# EAGLE board Teensy-Long (EAGLE 9.5.2)
REV: A
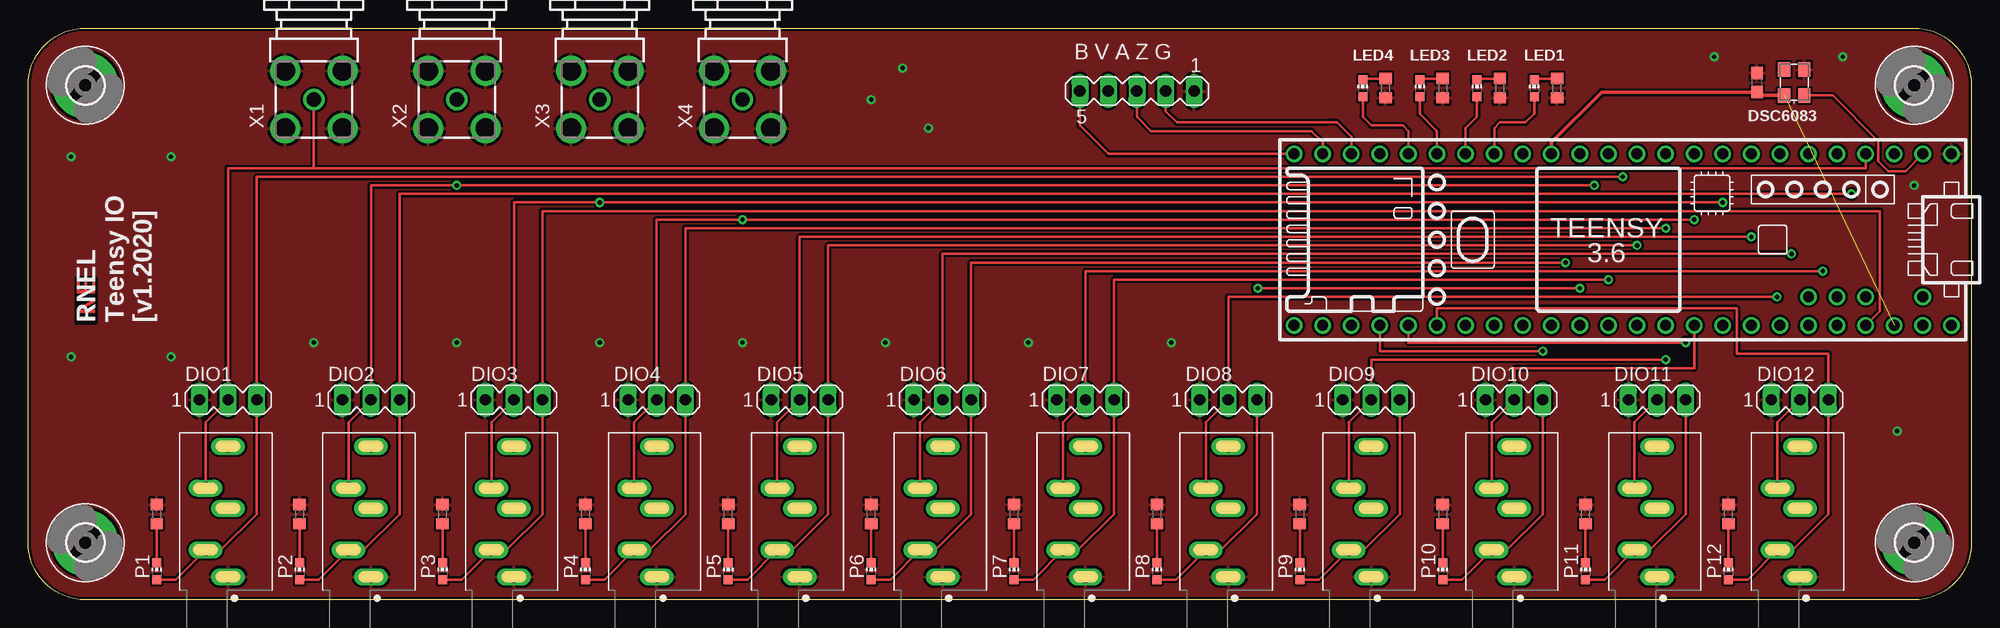
[diagram p0: board, top side]
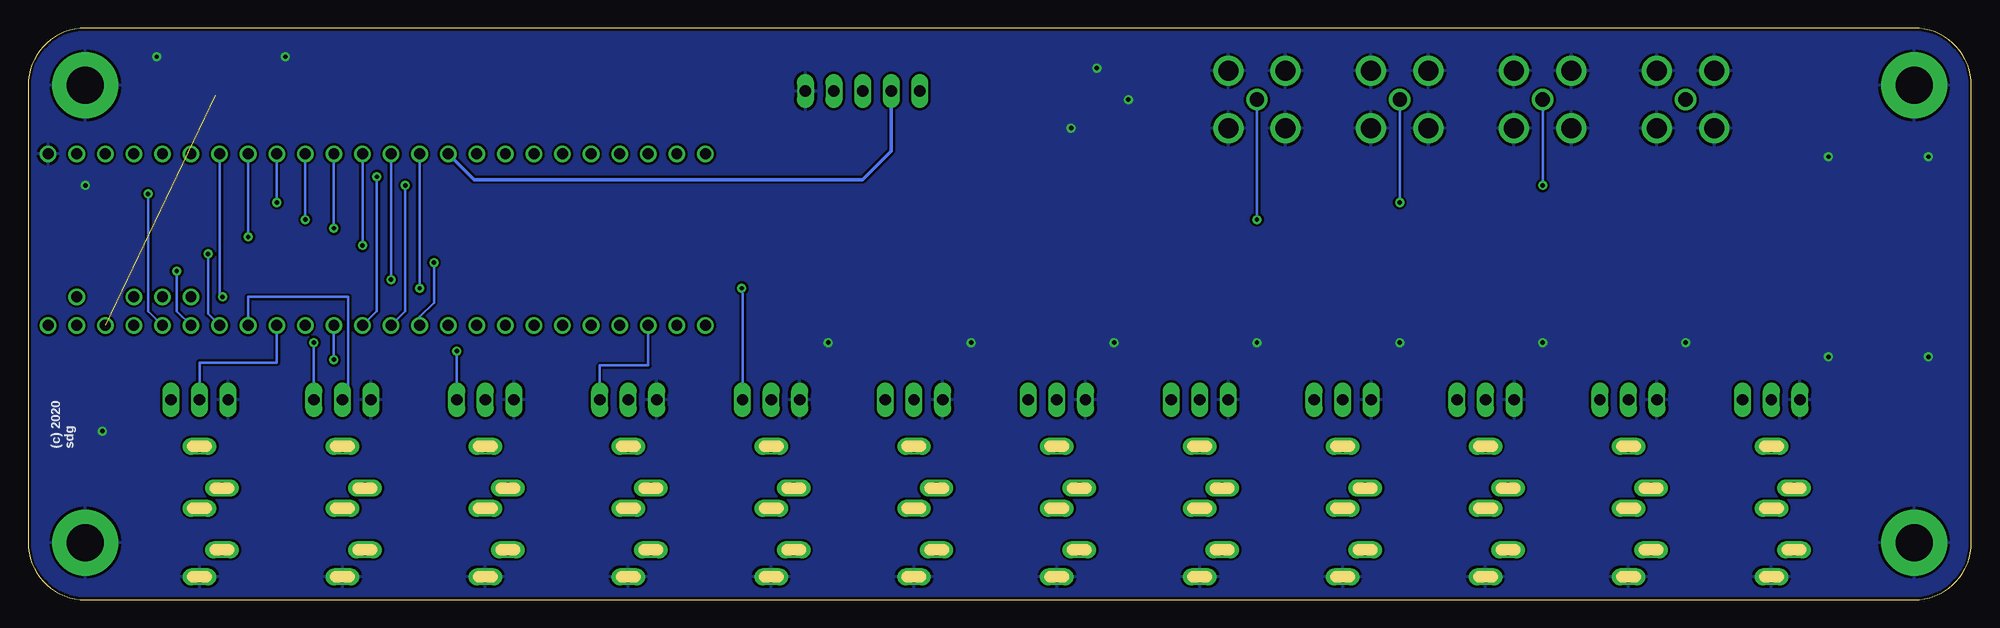
[diagram p1: board, bottom side, seen from below]

Size 172.72 x 50.8 mm. Coordinates in mm from the lower left corner, seen from the top.
Outline: 5.08,50.8 167.64,50.8 arc-90 172.72,45.72 172.72,5.08 arc-90 167.64,0 5.08,0 arc-90 0,5.08 0,45.72 arc-90 5.08,50.8
Copper layers (1*16): Top 0.035mm / dielectric 1.5mm / Bottom 0.035mm
Design rules "adafruit *": minimum track width 8mil, minimum drill 15.5mil, track to track 8mil, track to pad 8mil, pad to pad 8mil, via to via 8mil, smd to smd 8mil, copper to edge 10mil, drill to drill 8mil, minimum pad ring 10mil, minimum via ring 8mil, stop-mask expansion 2mil, vias tented up to drill 20mil, thermal gap 10mil
Net classes: 0 default: clearance 0.205 mm

## Footprints (pad centres in the part's own frame; a part is rotated, then mirrored left to right if it is on the bottom)
MA05-1 = drill 1.016 long: 1 -5.08,0; 2 -2.54,0; 3 0,0; 4 2.54,0; 5 5.08,0
C0603 = smd 1.1 x 1: 1 -0.85,0; 2 0.85,0
MA03-1 = drill 1.016 long: 1 -2.54,0; 2 0,0; 3 2.54,0
3.2X2.5_KXO-V96 = smd 1.3 x 1.1: 1 -1.15,-0.9; 2 1.15,-0.9; 3 1.15,0.9; 4 -1.15,0.9
3,3-PAD = drill 3.3 pad 5.842: B3,3 0,0
CUI_SJ1-3535 = drill 1 long: 1 0,0; 2 2.4,2; 3 7.9,2; 4 11.6,0; 5 6.1,0
CHIP-LED0603 = smd 0.8 x 0.8: A 0,-0.75; C 0,0.75
R0603 = smd 1 x 1.1: 1 -0.85,0; 2 0.85,0
TEENSY_3.5/3.6_BASIC = drill 0.965: 0/RX -25.4,-7.62; 1/TX -22.86,-7.62; 2 -20.32,-7.62; 3/CANTX -17.78,-7.62; 3V3 7.62,-7.62; 3V3_LO -22.86,7.62; 4/CANRX -15.24,-7.62; 5 -12.7,-7.62; 6 -10.16,-7.62; 7 -7.62,-7.62; 8 -5.08,-7.62; 9/CS -2.54,-7.62; 10/CS 0,-7.62; 11/MOSI 2.54,-7.62; 12/MISO 5.08,-7.62; 13/SCK 5.08,7.62; 14/A0 2.54,7.62; 15/A1 0,7.62; 16/A2 -2.54,7.62; 17/A3 -5.08,7.62; 18/A4/SDA -7.62,7.62; 19/A5/SCL -10.16,7.62; 20/A6 -12.7,7.62; 21/A7 -15.24,7.62; 21/DAC0 12.7,7.62; 22/A8 -17.78,7.62; 23/A9 -20.32,7.62; 24 10.16,-7.62; 25 12.7,-7.62; 26 15.24,-7.62; 27 17.78,-7.62; 28 20.32,-7.62; 29 22.86,-7.62; 30 25.4,-7.62; 31/A12 27.94,-7.62; 32/A13 30.48,-7.62; 33/A14 30.48,7.62; 34/A15 27.94,7.62; 35/A16 25.4,7.62; 36/A17 22.86,7.62; 37/A18 20.32,7.62; 38/A19 17.78,7.62; 39/A20 15.24,7.62; A10 -17.78,5.08; A11 -15.24,5.08; A22/DAC1 10.16,7.62; AGND -25.4,7.62; AREF -20.32,5.08; GND -27.94,-7.62; GND2 7.62,7.62; VIN -27.94,7.62; VUSB -25.4,5.08
BU-SMA-G = drill 1.27: 1 0,0 | drill 1.778: 2 -2.55,2.55; 3 2.55,2.55; 4 2.55,-2.55; 5 -2.55,-2.55

## Placement (x,y rotation side)
AMT102  [MA05-1]  98.55,45.21 180 top
C  0.1uF  [C0603]  153.67,45.97 90 top
DIO1  [MA03-1]  17.78,17.78 0 top
DIO2  [MA03-1]  30.48,17.78 0 top
DIO3  [MA03-1]  43.18,17.78 0 top
DIO4  [MA03-1]  55.88,17.78 0 top
DIO5  [MA03-1]  68.58,17.78 0 top
DIO6  [MA03-1]  81.28,17.78 0 top
DIO7  [MA03-1]  93.98,17.78 0 top
DIO8  [MA03-1]  106.68,17.78 0 top
DIO9  [MA03-1]  119.38,17.78 0 top
DIO10  [MA03-1]  132.08,17.78 0 top
DIO11  [MA03-1]  144.78,17.78 0 top
DIO12  [MA03-1]  157.48,17.78 0 top
DSC6083  2KHZ  [3.2X2.5_KXO-V96]  156.97,45.97 90 top
H1  MOUNT-PAD-ROUND3.3  [3,3-PAD]  167.64,5.08 90 top
H2  MOUNT-PAD-ROUND3.3  [3,3-PAD]  5.08,5.08 90 top
H3  MOUNT-PAD-ROUND3.3  [3,3-PAD]  5.08,45.72 90 top
H4  MOUNT-PAD-ROUND3.3  [3,3-PAD]  167.64,45.72 90 top
J1  SJ1-3535  [CUI_SJ1-3535]  17.78,2.03 90 top
J2  SJ1-3535  [CUI_SJ1-3535]  30.48,2.03 90 top
J3  SJ1-3535  [CUI_SJ1-3535]  43.18,2.03 90 top
J4  SJ1-3535  [CUI_SJ1-3535]  55.88,2.03 90 top
J5  SJ1-3535  [CUI_SJ1-3535]  68.58,2.03 90 top
J6  SJ1-3535  [CUI_SJ1-3535]  81.28,2.03 90 top
J7  SJ1-3535  [CUI_SJ1-3535]  93.98,2.03 90 top
J8  SJ1-3535  [CUI_SJ1-3535]  106.68,2.03 90 top
J9  SJ1-3535  [CUI_SJ1-3535]  119.38,2.03 90 top
J10  SJ1-3535  [CUI_SJ1-3535]  132.08,2.03 90 top
J11  SJ1-3535  [CUI_SJ1-3535]  144.78,2.03 90 top
J12  SJ1-3535  [CUI_SJ1-3535]  157.48,2.03 90 top
LED1  [CHIP-LED0603]  133.86,45.47 0 top
LED2  [CHIP-LED0603]  128.78,45.47 0 top
LED3  [CHIP-LED0603]  123.7,45.47 0 top
LED4  [CHIP-LED0603]  118.62,45.47 0 top
P1  [CHIP-LED0603]  11.43,2.54 0 top
P2  [CHIP-LED0603]  24.13,2.54 0 top
P3  [CHIP-LED0603]  36.83,2.54 0 top
P4  [CHIP-LED0603]  49.53,2.54 0 top
P5  [CHIP-LED0603]  62.23,2.54 0 top
P6  [CHIP-LED0603]  74.93,2.54 0 top
P7  [CHIP-LED0603]  87.63,2.54 0 top
P8  [CHIP-LED0603]  100.33,2.54 0 top
P9  [CHIP-LED0603]  113.03,2.54 0 top
P10  [CHIP-LED0603]  125.73,2.54 0 top
P11  [CHIP-LED0603]  138.43,2.54 0 top
P12  [CHIP-LED0603]  151.13,2.54 0 top
R1  R  [R0603]  11.43,7.62 90 top
R2  R  [R0603]  24.13,7.62 90 top
R3  R  [R0603]  36.83,7.62 90 top
R4  R  [R0603]  49.53,7.62 90 top
R5  R  [R0603]  62.23,7.62 90 top
R6  R  [R0603]  74.93,7.62 90 top
R7  R  [R0603]  87.63,7.62 90 top
R8  R  [R0603]  100.33,7.62 90 top
R9  R  [R0603]  113.03,7.62 90 top
R10  R  [R0603]  125.73,7.62 90 top
R11  R  [R0603]  138.43,7.62 90 top
R12  R  [R0603]  151.13,7.62 90 top
R_L1  R  [R0603]  135.89,45.47 270 top
R_L2  R  [R0603]  130.81,45.47 270 top
R_L3  R  [R0603]  125.73,45.47 270 top
R_L4  R  [R0603]  120.65,45.47 270 top
U$3  TEENSY_3.5/3.6_BASIC  [TEENSY_3.5/3.6_BASIC]  143,32 180 top
X1  BU-SMA-G  [BU-SMA-G]  25.4,44.45 90 top
X2  BU-SMA-G  [BU-SMA-G]  38.1,44.45 90 top
X3  BU-SMA-G  [BU-SMA-G]  50.8,44.45 90 top
X4  BU-SMA-G  [BU-SMA-G]  63.5,44.45 90 top

## Library data of the parts
AMT102 = con-lstb-mod; OC_FARNELL: unknown; OC_NEWARK: unknown
C = rcl; SPICEPREFIX: C
DIO1-DIO12 = con-lstb; OC_FARNELL: unknown; OC_NEWARK: unknown
DSC6083 = crystal-geyer_V1_0
H1-H4 = holes
J1-J12 = SJ1-3535; AVAILABILITY: Unavailable; CUI_PURCHASE_URL: https://www.cuidevices.com/product/interconnect/connectors/audio-connectors/jacks/sj1-353x-series?utm_source=snapeda.com&utm_medium=referral&utm_campaign=snapedaBOM; DESCRIPTION: 3.5 mm, Stereo, Right Angle, Through Hole, Threaded Bushing, Audio Jack Connector; MF: CUI Devices; MP: SJ1-3535; PACKAGE: None; PRICE: None
LED1-LED4 P1-P12 = led
R1-R12 R_L1-R_L4 = rcl; SPICEPREFIX: R
U$3 = Teensy356
X1-X4 = con-coax; OC_FARNELL: unknown; OC_NEWARK: unknown

## Nets
B0: DIO9.2 J9.3 U$3.16/A2
B1: DIO10.2 J10.3 U$3.17/A3
B2: DIO11.2 J11.3 U$3.19/A5/SCL
B3: DIO12.2 J12.3 U$3.18/A4/SDA
C0: DIO1.3 J1.2 P1.A U$3.15/A1
C1: DIO2.3 J2.2 P2.A U$3.22/A8
C2: DIO3.3 J3.2 P3.A U$3.23/A9
C3: DIO4.3 J4.2 P4.A U$3.9/CS
C4: DIO5.3 J5.2 P5.A U$3.10/CS
C5: DIO6.3 J6.2 P6.A U$3.13/SCK
C6: DIO7.3 J7.2 P7.A U$3.11/MOSI
C7: DIO8.3 J8.2 P8.A U$3.12/MISO
C8: DIO9.3 J9.2 P9.A U$3.35/A16
C9: DIO10.3 J10.2 P10.A U$3.36/A17
C10: DIO11.3 J11.2 P11.A U$3.37/A18
C11: DIO12.3 J12.2 P12.A U$3.38/A19
D0: DIO1.2 J1.3 U$3.2 X1.1
D1: DIO2.2 J2.3 U$3.14/A0 X2.1
D2: DIO3.2 J3.3 U$3.7 X3.1
D3: DIO4.2 J4.3 U$3.8 X4.1
D4: DIO5.2 J5.3 U$3.6
D5: DIO6.2 J6.3 U$3.20/A6
D6: DIO7.2 J7.3 U$3.21/A7
D7: DIO8.2 J8.3 U$3.5
EXT_CLK: DSC6083.1 U$3.0/RX
GND: AMT102.1 C.2 DIO1.1 DIO2.1 DIO3.1 DIO4.1 DIO5.1 DIO6.1 DIO7.1 DIO8.1 DIO9.1 DIO10.1 DIO11.1 DIO12.1 DSC6083.2 H1.B3,3 H2.B3,3 H3.B3,3 H4.B3,3 J1.1 J2.1 J3.1 J4.1 J5.1 J6.1 J7.1 J8.1 J9.1 J10.1 J11.1 J12.1 R1.2 R2.2 R3.2 R4.2 R5.2 R6.2 R7.2 R8.2 R9.2 R10.2 R11.2 R12.2 R_L1.2 R_L2.2 R_L3.2 R_L4.2 U$3.GND X1.2 X1.3 X1.4 X1.5 X2.2 X2.3 X2.4 X2.5 X3.2 X3.3 X3.4 X3.5 X4.2 X4.3 X4.4 X4.5
LED0: LED1.A U$3.25
LED1: LED2.A U$3.26
LED2: LED3.A U$3.27
LED3: LED4.A U$3.28
N$1: LED1.C R_L1.1
N$2: LED2.C R_L2.1
N$3: P5.C R5.1
N$4: P1.C R1.1
N$5: LED3.C R_L3.1
N$6: LED4.C R_L4.1
N$7: P2.C R2.1
N$8: P3.C R3.1
N$9: P4.C R4.1
N$10: P6.C R6.1
N$11: P7.C R7.1
N$12: P8.C R8.1
N$13: P9.C R9.1
N$14: P10.C R10.1
N$15: P11.C R11.1
N$16: P12.C R12.1
QUADA: AMT102.3 U$3.31/A12
QUADB: AMT102.5 U$3.32/A13
QUADZ: AMT102.2 U$3.30
VDD: AMT102.4 C.1 DSC6083.4 U$3.3V3 U$3.3V3_LO

## Tracks (layer width: path | path; a pad name or v marks a point on that pad's centre or on a via)
B0  (via drill 0.39)
  Top 0.203: v145.54,21.34 119.38,21.34 DIO9.2 117.38,15.78 J9.3
  Bottom 0.203: v145.54,21.34 U$3.16/A2
B1
  Top 0.203: U$3.17/A3 148.08,20.57 132.08,20.57 DIO10.2 130.08,15.78 J10.3
B2
  Top 0.203: DIO11.2 142.78,15.78 J11.3
  Bottom 0.203: U$3.19/A5/SCL 153.16,26.92 144.27,26.92 144.27,17.78 DIO11.2
B3
  Top 0.203: J12.3 155.48,15.78 DIO12.2
  Bottom 0.203: DIO12.2 157.48,21.08 150.62,21.08 U$3.18/A4/SDA
C0  (via drill 0.39)
  Top 0.203: v141.73,37.59 20.32,37.59 DIO1.3 20.32,7.62 17.13,4.43 J1.2 13.14,1.79 P1.A
  Bottom 0.203: v141.73,37.59 141.73,25.65 U$3.15/A1
C1  (via drill 0.39)
  Top 0.203: v162.05,36.07 33.02,36.07 DIO2.3 33.02,7.62 29.83,4.43 J2.2 25.84,1.79 P2.A
  Bottom 0.203: U$3.22/A8 162.05,25.65 v162.05,36.07
C2
  Top 0.203: U$3.23/A9 164.59,25.65 164.59,34.54 45.72,34.54 DIO3.3 45.72,7.62 42.53,4.43 J3.2 38.54,1.79 P3.A
C3  (via drill 0.39)
  Top 0.203: v145.54,33.02 58.42,33.02 DIO4.3 58.42,7.62 55.23,4.43 J4.2 51.24,1.79 P4.A
  Bottom 0.203: v145.54,33.02 U$3.9/CS
C4  (via drill 0.39)
  Top 0.203: v143,31.5 71.12,31.5 DIO5.3 71.12,7.62 67.93,4.43 J5.2 63.94,1.79 P5.A
  Bottom 0.203: v143,31.5 U$3.10/CS
C5  (via drill 0.39)
  Top 0.203: v136.65,29.97 83.82,29.97 DIO6.3 83.82,7.62 80.63,4.43 J6.2 76.64,1.79 P6.A
  Bottom 0.203: U$3.13/SCK 137.92,25.15 136.65,26.42 v136.65,29.97
C6  (via drill 0.39)
  Top 0.203: v140.46,28.45 96.52,28.45 DIO7.3 96.52,7.62 93.33,4.43 J7.2 89.34,1.79 P7.A
  Bottom 0.203: v140.46,28.45 U$3.11/MOSI
C7  (via drill 0.39)
  Top 0.203: v109.3,27.69 v137.92,27.69 | DIO8.3 109.22,7.62 106.03,4.43 J8.2 102.04,1.79 P8.A
  Bottom 0.203: v109.3,27.69 109.22,27.61 DIO8.3 | v137.92,27.69 U$3.12/MISO
C8
  Top 0.203: DIO9.3 121.92,7.62 118.73,4.43 J9.2 114.74,1.79 P9.A
  Bottom 0.203: DIO9.3 121.92,20.83 117.6,20.83 U$3.35/A16
C9  (via drill 0.39)
  Top 0.203: U$3.36/A17 120.14,22.1 v134.62,22.1 | DIO10.3 134.62,7.62 131.43,4.43 J10.2 127.44,1.79 P10.A
  Bottom 0.203: v134.62,22.1 DIO10.3
C10  (via drill 0.39)
  Top 0.203: U$3.37/A18 122.68,22.86 v147.32,22.86 | DIO11.3 147.32,7.62 144.13,4.43 J11.2 140.14,1.79 P11.A
  Bottom 0.203: v147.32,22.86 DIO11.3
C11
  Top 0.203: U$3.38/A19 125.22,25.91 151.89,25.91 151.89,21.84 160.02,21.84 DIO12.3 160.02,7.62 156.83,4.43 J12.2 152.84,1.79 P12.A
D0
  Top 0.203: U$3.2 163.32,38.35 25.4,38.35 | 25.4,38.35 17.78,38.35 DIO1.2 15.78,15.78 J1.3 | X1.1 25.4,38.35
D1  (via drill 0.39)
  Top 0.203: v139.19,36.83 v38.1,36.83 30.48,36.83 DIO2.2 28.48,15.78 J2.3
  Bottom 0.203: v139.19,36.83 139.19,25.65 U$3.14/A0 | X2.1 v38.1,36.83
D2  (via drill 0.39)
  Top 0.203: v150.62,35.31 v50.8,35.31 43.18,35.31 DIO3.2 41.18,15.78 J3.3
  Bottom 0.203: v150.62,35.31 U$3.7 | X3.1 v50.8,35.31
D3  (via drill 0.39)
  Top 0.203: v148.08,33.78 v63.5,33.78 55.88,33.78 DIO4.2 53.88,15.78 J4.3
  Bottom 0.203: v148.08,33.78 U$3.8 | X4.1 v63.5,33.78
D4  (via drill 0.39)
  Top 0.203: v153.16,32.26 68.58,32.26 DIO5.2 66.58,15.78 J5.3
  Bottom 0.203: v153.16,32.26 U$3.6
D5  (via drill 0.39)
  Top 0.203: v156.72,30.73 81.28,30.73 DIO6.2 79.28,15.78 J6.3
  Bottom 0.203: v156.72,30.73 156.72,25.4 U$3.20/A6
D6  (via drill 0.39)
  Top 0.203: v159.51,29.21 93.98,29.21 DIO7.2 91.98,15.78 J7.3
  Bottom 0.203: U$3.21/A7 159.51,25.65 v159.51,29.21
D7  (via drill 0.39)
  Top 0.203: v155.45,26.92 106.68,26.92 DIO8.2 104.68,15.78 J8.3
  Bottom 0.203: U$3.5 155.7,27.18 v155.45,26.92
EXT_CLK
  Top 0.203: U$3.0/RX 166.88,38.1 165.35,38.1 164.47,38.99 164.47,40.77 160.41,44.82 DSC6083.1
GND  (via drill 0.39)
  other vias: 167.64,36.83 161.29,48.26 149.86,48.26 74.93,44.45 77.72,47.24 80.01,41.91 166.12,14.99 101.6,22.86 88.9,22.86 76.2,22.86 63.5,22.86 50.8,22.86 38.1,22.86 25.4,22.86 3.81,21.59 12.7,21.59 12.7,39.37 3.81,39.37
  pour Top: 0,0 172.72,0 172.72,50.8 0,51.05 0,50.8
  pour Bottom: 0,0 172.72,0 172.72,50.8 0,50.8
LED0
  Top 0.203: U$3.25 130.3,41.91 130.81,42.42 133.1,42.42 133.86,43.18 LED1.A
LED1
  Top 0.203: U$3.26 127.76,41.91 128.78,42.93 LED2.A
LED2
  Top 0.203: U$3.27 125.22,41.66 123.7,43.18 LED3.A
LED3
  Top 0.203: U$3.28 122.68,41.66 122.17,42.16 119.38,42.16 118.62,42.93 LED4.A
N$1
  Top 0.203: LED1.C 133.96,46.32 R_L1.1
N$2
  Top 0.203: LED2.C 128.78,46.32 R_L2.1
N$3
  Top 0.203: R5.1 P5.C
N$4
  Top 0.203: P1.C R1.1
N$5
  Top 0.203: LED3.C 123.7,46.32 R_L3.1
N$6
  Top 0.203: LED4.C 118.62,46.32 R_L4.1
N$7
  Top 0.203: R2.1 P2.C
N$8
  Top 0.203: R3.1 P3.C
N$9
  Top 0.203: R4.1 P4.C
N$10
  Top 0.203: R6.1 P6.C
N$11
  Top 0.203: R7.1 P7.C
N$12
  Top 0.203: R8.1 P8.C
N$13
  Top 0.203: R9.1 P9.C
N$14
  Top 0.203: R10.1 P10.C
N$15
  Top 0.203: R11.1 P11.C
N$16
  Top 0.203: R12.1 P12.C
QUADA
  Top 0.203: AMT102.3 98.55,42.93 99.82,41.66 114.05,41.66 115.06,40.64 U$3.31/A12
QUADB
  Top 0.203: AMT102.5 93.47,42.16 96.01,39.62 U$3.32/A13
QUADZ
  Top 0.203: AMT102.2 101.09,43.43 102.11,42.42 115.32,42.42 115.57,42.42 116.33,42.42 117.6,41.15 U$3.30
VDD  (1 unrouted)
  Top 0.305: U$3.3V3 135.38,40.64 139.87,45.12 C.1 153.97,44.82 DSC6083.4
  Bottom 0.305: AMT102.4 96.01,39.88 98.55,37.34 133.1,37.34 U$3.3V3

## Text on the board
Top: NE
tPlace: RNEL / Teensy IO / [v1.2020]
bPlace: (c) 2020 / sdg
tNames: B V A Z G
tStop: NE